# EAGLE board opjpcbprintheadV5 v18 (EAGLE 9.7.0)
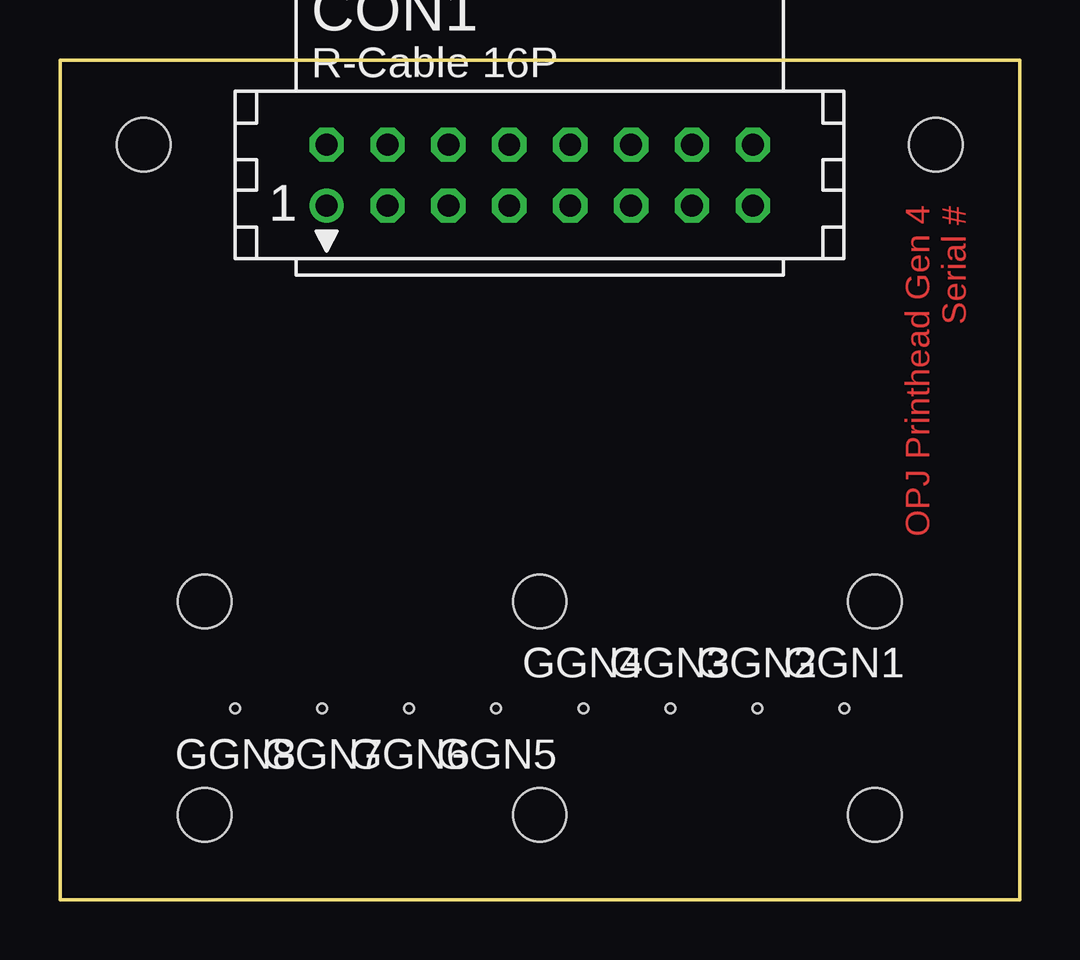
[diagram p0: board, top side]
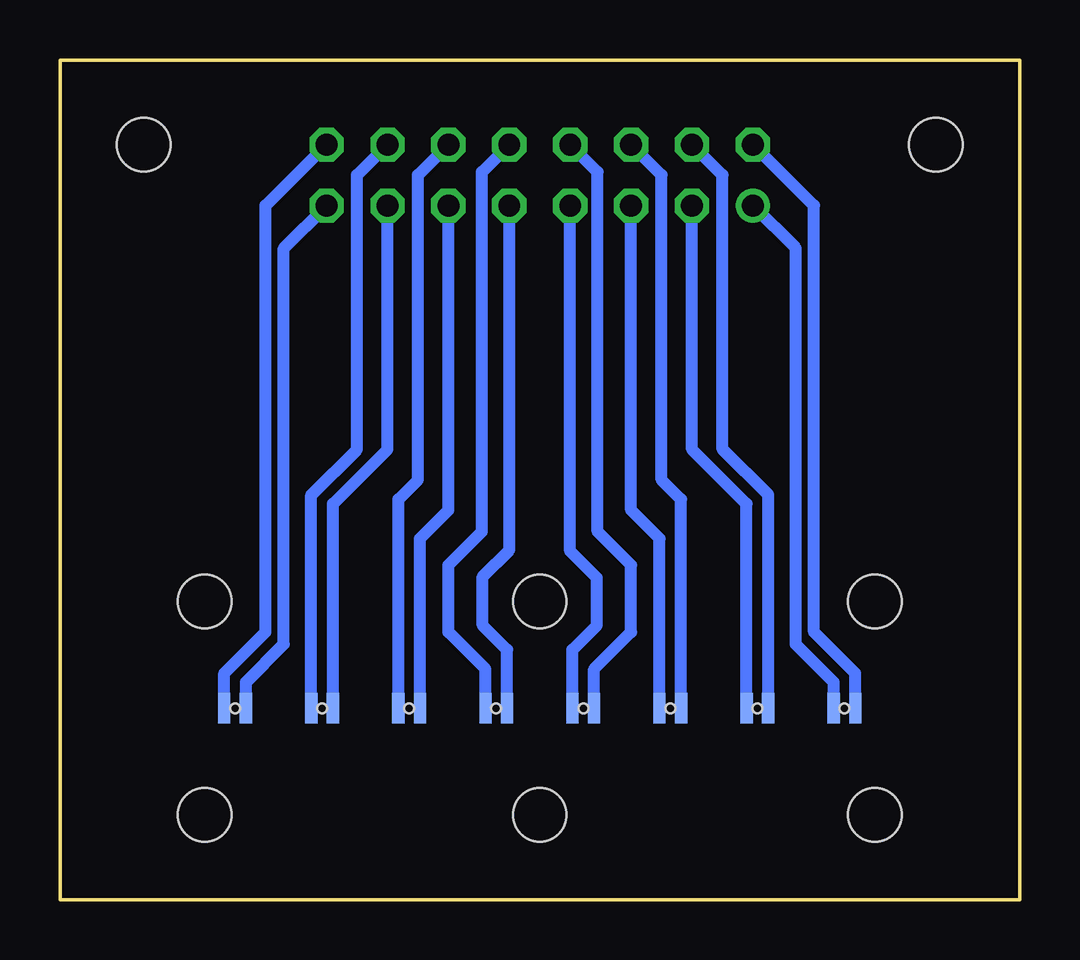
[diagram p1: board, bottom side, seen from below]

Size 40 x 35 mm. Coordinates in mm from the lower left corner, seen from the top.
Outline: 0,35 0,0 40,0 40,35 0,35
Copper layers (1*16): Top / Bottom
Stack-up Default Layer Stack: Top User Defined 0.035mm / Dielectric-1 User Defined 1.5mm / Bottom User Defined 0.035mm
Design rules "default": minimum track width 6mil, minimum drill 0.35mm, track to track 6mil, track to pad 6mil, pad to pad 6mil, via to via 6mil, smd to smd 6mil, copper to edge 40mil, drill to drill 6mil, minimum pad ring 10mil, minimum via ring 8mil, stop-mask expansion 4mil, vias tented up to drill 0mil, thermal gap 10mil
Holes 2.23 mm at 33.97,12.42 20,12.42 6.03,12.42 33.97,3.53 20,3.53 6.03,3.53 36.51,31.47 3.49,31.47

## Footprints (pad centres in the part's own frame; a part is rotated, then mirrored left to right if it is on the bottom)
CON16 = drill 0.914: 1 -8.89,-1.27 | drill 0.914 octagon: 2 -8.89,1.27; 3 -6.35,-1.27; 4 -6.35,1.27; 5 -3.81,-1.27; 6 -3.81,1.27; 7 -1.27,-1.27; 8 -1.27,1.27; 9 1.27,-1.27; 10 1.27,1.27; 11 3.81,-1.27; 12 3.81,1.27; 13 6.35,-1.27; 14 6.35,1.27; 15 8.89,-1.27; 16 8.89,1.27
OPJGASGUN = smd 0.508 x 1.27 bottom: GND 0.45,0; VCC -0.45,0 | hole 0.4: 0,0

## Placement (x,y rotation side)
CON1  [CON16]  20,30.2 0 top
GGN1  [OPJGASGUN]  32.7,7.97 0 top
GGN2  [OPJGASGUN]  29.07,7.97 0 top
GGN3  [OPJGASGUN]  25.44,7.97 0 top
GGN4  [OPJGASGUN]  21.81,7.97 0 top
GGN5  [OPJGASGUN]  18.19,7.97 180 top
GGN6  [OPJGASGUN]  14.56,7.97 180 top
GGN7  [OPJGASGUN]  10.93,7.97 180 top
GGN8  [OPJGASGUN]  7.3,7.97 180 top

## Library data of the parts
CON1 = con-harting; OC_FARNELL: unknown; OC_NEWARK: unknown
GGN1-GGN8 = openpyrojetlibrary

## Nets
N$1: CON1.1 GGN8.VCC
N$2: CON1.3 GGN7.VCC
N$3: CON1.5 GGN6.VCC
N$4: CON1.7 GGN5.VCC
N$5: CON1.9 GGN4.VCC
N$6: CON1.11 GGN3.VCC
N$7: CON1.13 GGN2.VCC
N$8: CON1.15 GGN1.VCC
N$9: CON1.16 GGN1.GND
N$10: CON1.2 GGN8.GND
N$11: CON1.4 GGN7.GND
N$12: CON1.6 GGN6.GND
N$13: CON1.8 GGN5.GND
N$14: CON1.14 GGN2.GND
N$15: CON1.12 GGN3.GND
N$16: CON1.10 GGN4.GND

## Tracks (layer width: path | path; a pad name or v marks a point on that pad's centre or on a via)
N$1
  Bottom 0.508: GGN8.VCC 7.75,9.06 9.33,10.64 9.33,27.15 CON1.1
N$2
  Bottom 0.508: GGN7.VCC 11.38,16.5 13.65,18.77 CON1.3
N$3
  Bottom 0.508: GGN6.VCC 15.01,15.05 16.19,16.23 CON1.5
N$4
  Bottom 0.508: CON1.7 18.73,14.52 17.62,13.41 17.62,11.43 18.64,10.41 GGN5.VCC
N$5
  Bottom 0.508: CON1.9 21.27,14.58 22.38,13.46 22.38,11.43 21.36,10.41 GGN4.VCC
N$6
  Bottom 0.508: GGN3.VCC 24.99,15.05 23.81,16.23 CON1.11
N$7
  Bottom 0.508: GGN2.VCC 28.62,16.5 26.35,18.77 CON1.13
N$8
  Bottom 0.508: GGN1.VCC 32.25,9.06 30.67,10.64 30.67,27.15 CON1.15
N$9
  Bottom 0.508: GGN1.GND 33.15,9.43 31.43,11.15 31.43,28.93 CON1.16
N$10
  Bottom 0.508: GGN8.GND 6.85,9.43 8.57,11.15 8.57,28.93 CON1.2
N$11
  Bottom 0.508: GGN7.GND 10.48,16.87 12.38,18.77 12.38,30.2 CON1.4
N$12
  Bottom 0.508: GGN6.GND 14.11,16.69 14.92,17.5 14.92,30.2 CON1.6
N$13
  Bottom 0.508: GGN5.GND 17.74,9.6 16.19,11.15 16.19,13.94 17.59,15.34 17.59,30.33 CON1.8
N$14
  Bottom 0.508: GGN2.GND 29.52,16.87 27.62,18.77 27.62,30.2 CON1.14
N$15
  Bottom 0.508: GGN3.GND 25.89,16.69 25.08,17.5 25.08,30.2 CON1.12
N$16
  Bottom 0.508: CON1.10 22.41,30.33 22.41,15.34 23.81,13.94 23.81,11.15 22.26,9.6 GGN4.GND

## Text on the board
Top: OPJ Printhead Gen 4 / Serial #